# EAGLE board Analog signal processing sch (EAGLE 9.6.2)

Size 100 x 80 mm. Coordinates in mm from the lower left corner, seen from the top.
Outline: 0,0 100,0 100,80 0,80 0,0
Copper layers (1*16): Top 0.035mm / dielectric 1.5mm / Bottom 0.035mm
Design rules "default": minimum track width 6mil, minimum drill 0.35mm, track to track 6mil, track to pad 6mil, pad to pad 6mil, via to via 6mil, smd to smd 6mil, copper to edge 40mil, drill to drill 6mil, minimum pad ring 10mil, minimum via ring 8mil, stop-mask expansion 4mil, vias tented up to drill 0mil, thermal gap 10mil

## Footprints (pad centres in the part's own frame; a part is rotated, then mirrored left to right if it is on the bottom)
ESP32_THING_NO_ANT = drill 1.016 pad 1.88 square: 1 1.27,1.27; 40 24.13,1.27 | drill 1.016 pad 1.88: 2 1.27,3.81; 3 1.27,6.35; 4 1.27,8.89; 5 1.27,11.43; 6 1.27,13.97; 7 1.27,16.51; 8 1.27,19.05; 9 1.27,21.59; 10 1.27,24.13; 11 1.27,26.67; 12 1.27,29.21; 13 1.27,31.75; 14 1.27,34.29; 15 1.27,36.83; 16 1.27,39.37; 17 1.27,41.91; 18 1.27,44.45; 19 1.27,46.99; 20 1.27,49.53; 21 24.13,49.53; 22 24.13,46.99; 23 24.13,44.45; 24 24.13,41.91; 25 24.13,39.37; 26 24.13,36.83; 27 24.13,34.29; 28 24.13,31.75; 29 24.13,29.21; 30 24.13,26.67; 31 24.13,24.13; 32 24.13,21.59; 33 24.13,19.05; 34 24.13,16.51; 35 24.13,13.97; 36 24.13,11.43; 37 24.13,8.89; 38 24.13,6.35; 39 24.13,3.81
C025-024X044 = drill 0.813 octagon: 1 -1.27,0; 2 1.27,0
DO35-10 = drill 0.813 long: A 5.08,0; C -5.08,0
22-23-2021 = drill 1 long: 1 -1.27,0; 2 1.27,0
HLMP6 = drill 0.813 long: A -1.27,0; K 1.27,0
MA04-1 = drill 1.016 long: 1 -3.81,0; 2 -1.27,0; 3 1.27,0; 4 3.81,0
DIL14 = drill 0.813 long: 1 -7.62,-3.81; 2 -5.08,-3.81; 3 -2.54,-3.81; 4 0,-3.81; 5 2.54,-3.81; 6 5.08,-3.81; 7 7.62,-3.81; 8 7.62,3.81; 9 5.08,3.81; 10 2.54,3.81; 11 0,3.81; 12 -2.54,3.81; 13 -5.08,3.81; 14 -7.62,3.81
0204/7 = drill 0.813 octagon: 1 -3.81,0; 2 3.81,0
TO18 = drill 0.813 octagon: 1 -1.27,-1.27; 2 1.27,-1.27; 3 1.27,1.27

## Placement (x,y rotation side)
B2  ESP 32  [ESP32_THING_NO_ANT]  -39.37,1.27 0 top  (outside the outline)
C1  0.1 microF  [C025-024X044]  -44.45,73.66 0 top  (outside the outline)
C2  10 microF  [C025-024X044]  -49.53,73.66 0 top  (outside the outline)
C3  10 microF  [C025-024X044]  -54.61,73.66 0 top  (outside the outline)
D1  1N4446  [DO35-10]  -50.8,63.5 0 top  (outside the outline)
FAN  5V BLDC FAN  [22-23-2021]  -20.32,66.04 0 top  (outside the outline)
FLYBACK_DIODE  1N4446  [DO35-10]  -36.83,63.5 0 top  (outside the outline)
GREEN_LED  HLMP6  [HLMP6]  -48.26,80.01 0 top  (outside the outline)
KY-038  [MA04-1]  -34.29,73.66 0 top  (outside the outline)
OP_AMP_  LM324N  [DIL14]  -49.53,6.35 0 top  (outside the outline)
R1  10k  [0204/7]  -57.15,80.01 0 top  (outside the outline)
R2  10k  [0204/7]  -17.78,85.09 0 top  (outside the outline)
R3  100  [0204/7]  -27.94,85.09 0 top  (outside the outline)
R4  10k  [0204/7]  -38.1,85.09 0 top  (outside the outline)
R5  10k  [0204/7]  -48.26,85.09 0 top  (outside the outline)
R6  10k  [0204/7]  -58.42,85.09 0 top  (outside the outline)
R7  15k  [0204/7]  -17.78,90.17 0 top  (outside the outline)
R8  10k  [0204/7]  -27.94,90.17 0 top  (outside the outline)
R9  10k  [0204/7]  -38.1,90.17 0 top  (outside the outline)
R10  330  [0204/7]  -48.26,90.17 0 top  (outside the outline)
R11  220  [0204/7]  -58.42,90.17 0 top  (outside the outline)
R12  220  [0204/7]  -17.78,95.25 0 top  (outside the outline)
T1  2N2222  [TO18]  -22.86,74.93 0 top  (outside the outline)
YELLOW_LED  HLMP6  [HLMP6]  -29.21,80.01 0 top  (outside the outline)

## Library data of the parts
B2 = SparkFun-Boards
C1-C3 = rcl; SPICEPREFIX: C
D1 FLYBACK_DIODE = diode
FAN = con-molex; MF: MOLEX; MPN: 22-23-2021; OC_FARNELL: 1462926; OC_NEWARK: 25C3832
GREEN_LED YELLOW_LED = display-hp; MF: AGILENT TECHNOLOGIES; MPN: HLMP-6500; OC_FARNELL: 1652490; OC_NEWARK: 40K0088
KY-038 = con-lstb; OC_FARNELL: unknown; OC_NEWARK: unknown
OP_AMP_ = linear
R1-R12 = rcl; SPICEPREFIX: R
T1 = transistor

## Nets
+3V3: B2.36 KY-038.3 R1.2 R7.2 R9.1
+5V: FAN.2 FLYBACK_DIODE.C
GND: B2.21 C2.2 KY-038.2 R2.1 R4.1 R6.2 R11.1 R12.1 T1.1
N$1: C1.2 KY-038.1
N$2: C1.1 OP_AMP_.3 R1.1 R2.2
N$3: OP_AMP_.2 R3.1
N$4: D1.A OP_AMP_.1
N$5: C2.1 R3.2
N$6: C3.1 D1.C OP_AMP_.5 R4.2
N$7: OP_AMP_.6 OP_AMP_.7 OP_AMP_.10 R5.2
N$8: OP_AMP_.8 R5.1 R8.2
N$9: R8.1 T1.2
N$10: OP_AMP_.9 R6.1 R7.1
N$11: B2.14 R9.2 T1.3
N$12: B2.10 R10.2
N$13: R10.1
N$15: FAN.1 FLYBACK_DIODE.A
N$16: B2.15 GREEN_LED.A
N$17: B2.12 YELLOW_LED.A
N$18: GREEN_LED.K R12.2
N$19: R11.2 YELLOW_LED.K
V+: OP_AMP_.4
V-: OP_AMP_.11
VCC: C3.2

## Tracks (layer width: path | path; a pad name or v marks a point on that pad's centre or on a via)
+3V3  (4 unrouted)
+5V  (1 unrouted)
GND  (8 unrouted)
N$1  (1 unrouted)
N$2  (3 unrouted)
N$3  (1 unrouted)
N$4  (1 unrouted)
N$5  (1 unrouted)
N$6  (3 unrouted)
N$7  (3 unrouted)
N$8  (2 unrouted)
N$9  (1 unrouted)
N$10  (2 unrouted)
N$11  (2 unrouted)
N$12  (1 unrouted)
N$15  (1 unrouted)
N$16  (1 unrouted)
N$17  (1 unrouted)
N$18  (1 unrouted)
N$19  (1 unrouted)